# Altium PCB 4th_4G.PcbDoc
Units mm, origin at the board's own origin, x right, y up, seen from the top; angles counter-clockwise.
Board outline 35.75 x 48.25 mm, 2 copper layers (Top Layer, Bottom Layer); 40 components, 31 nets, 233 pads, 26 vias.
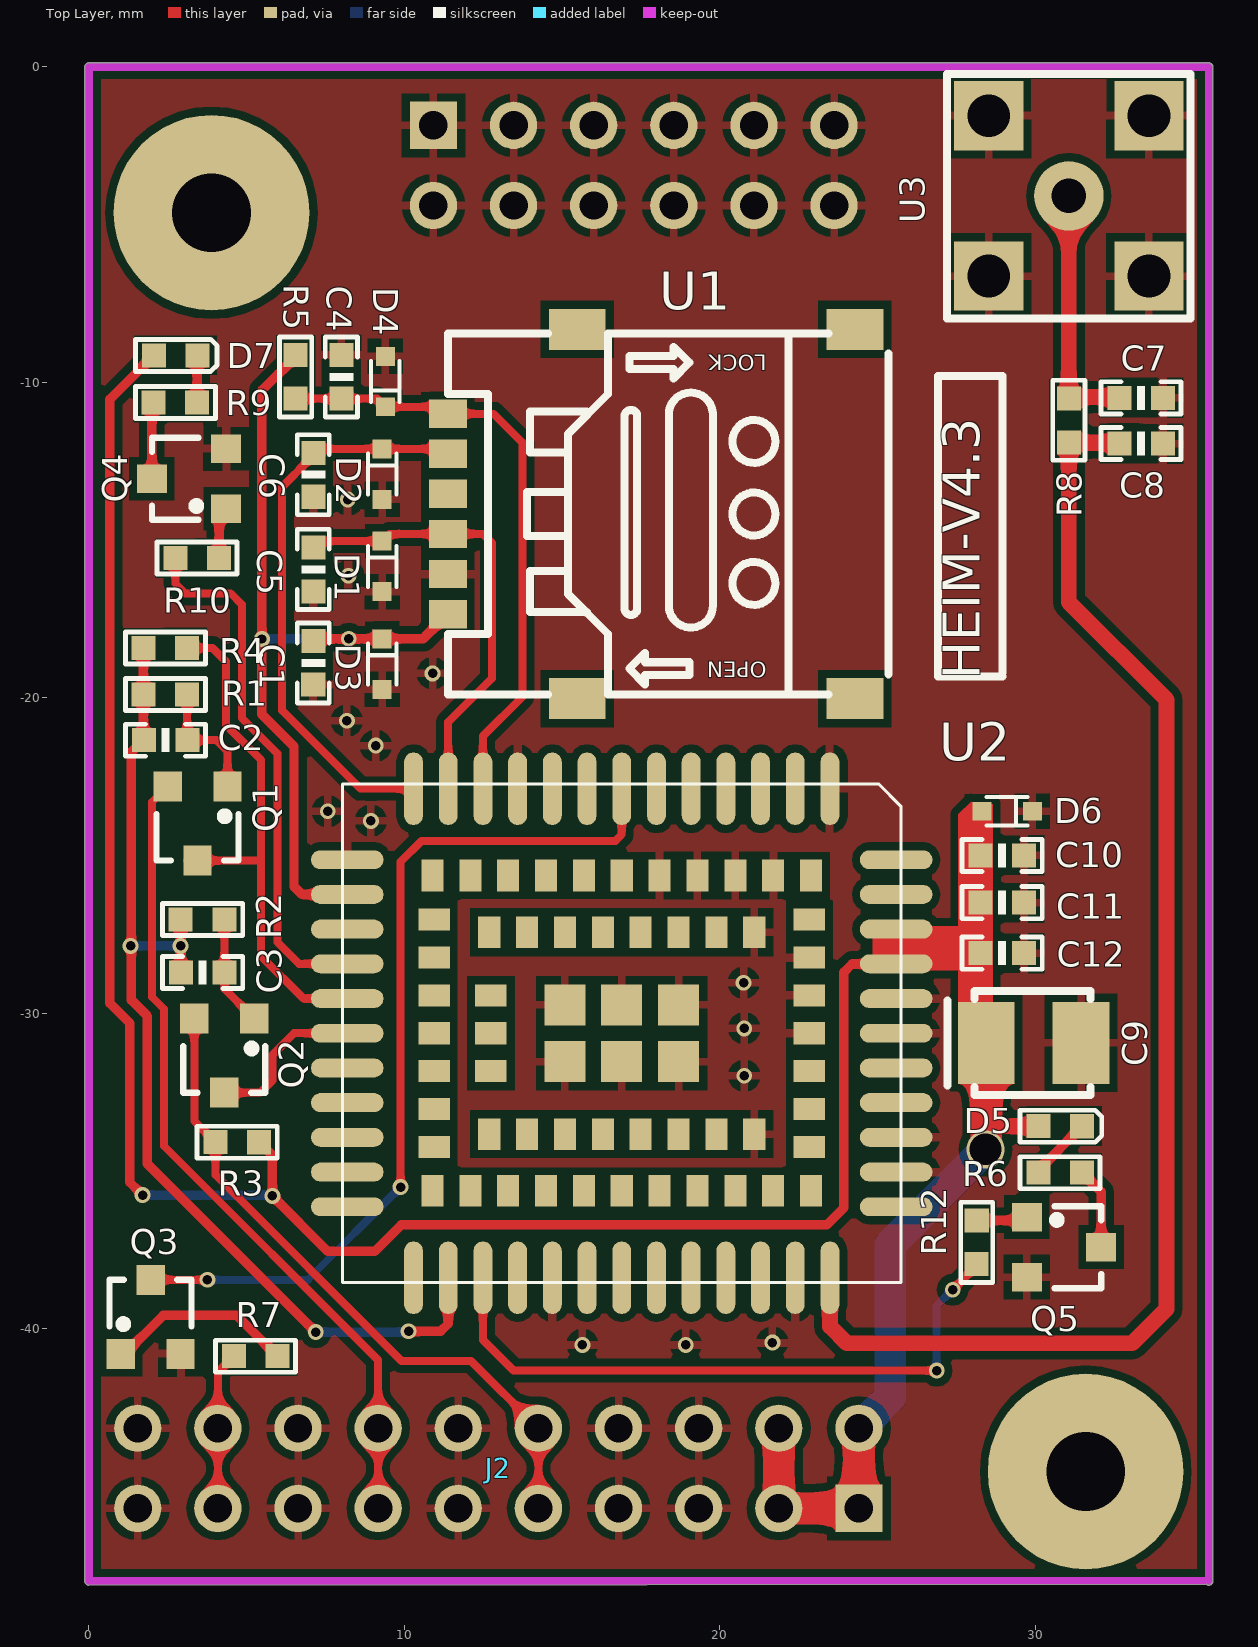
[diagram p0: Top Layer view]
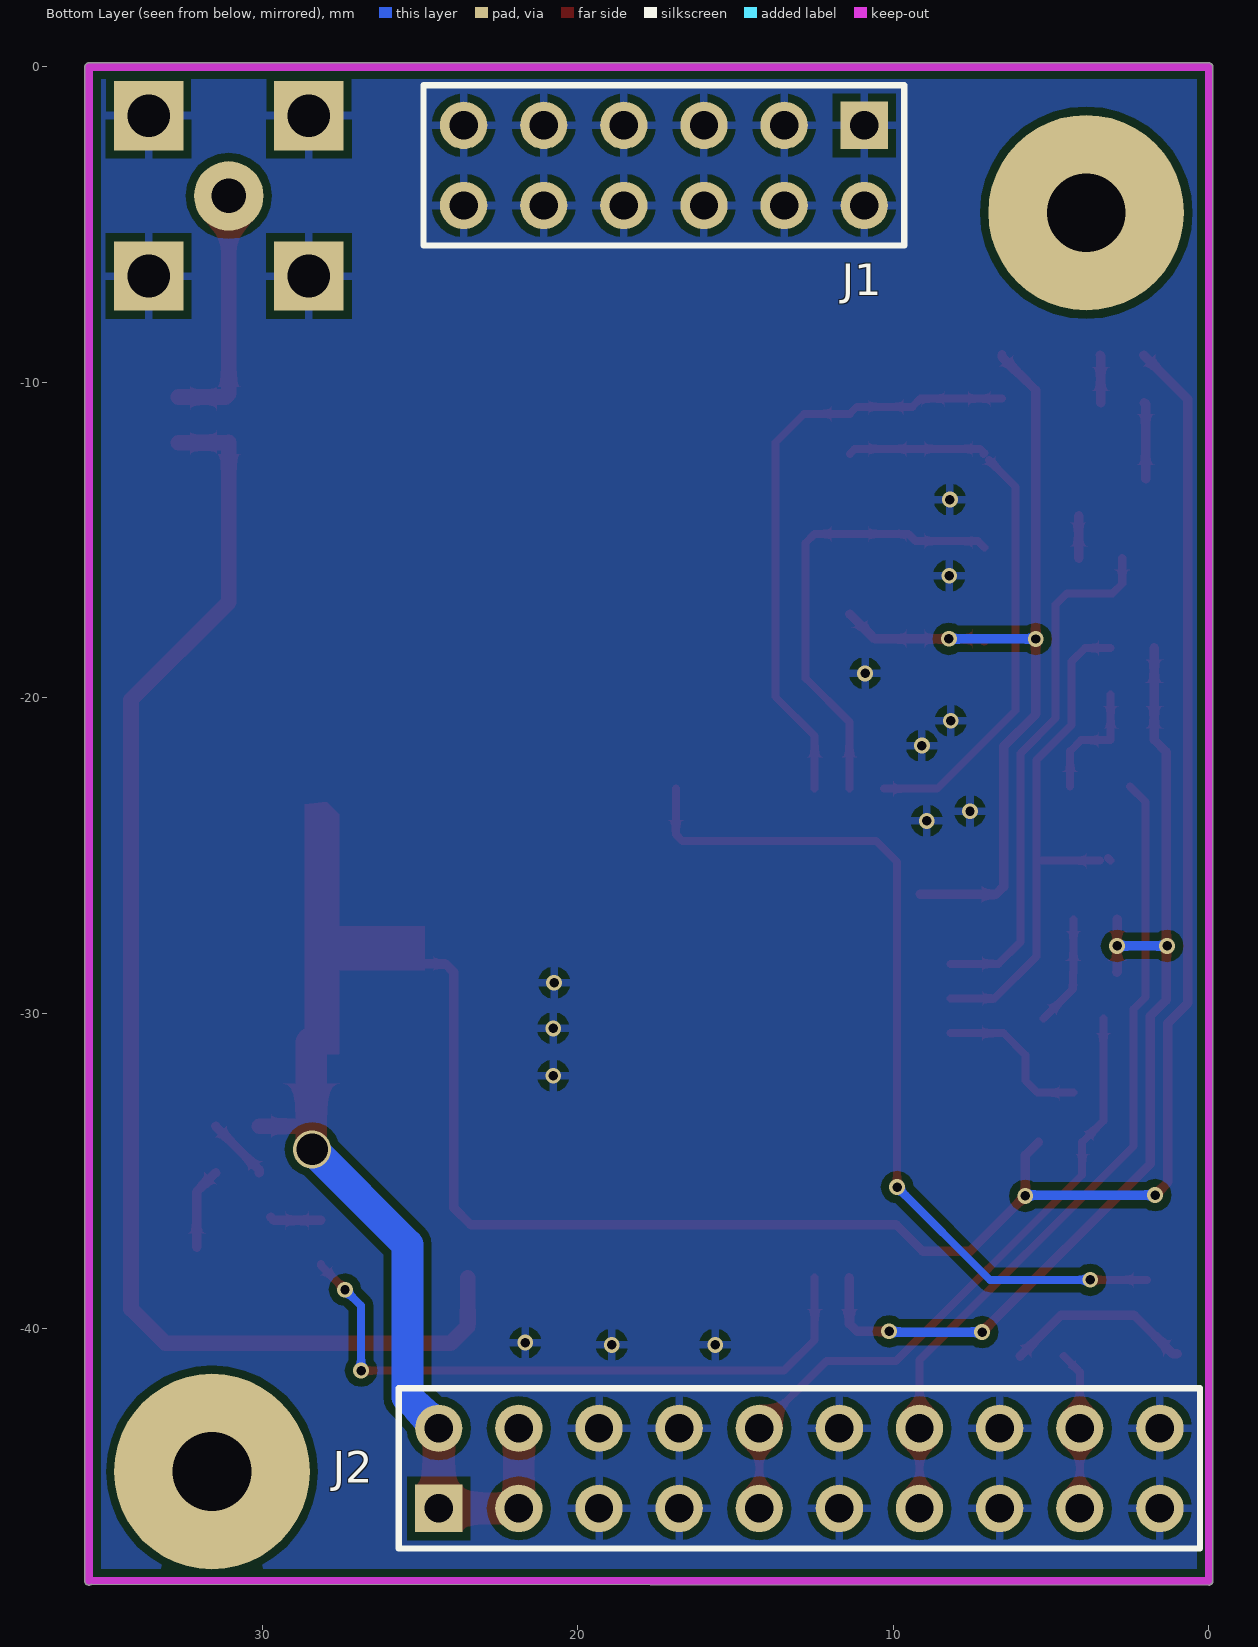
[diagram p1: Bottom Layer view, seen from below]

## Layer stack, top to bottom
Top Solder: solder mask 0.0102, Solder Resist, Dk 3.5
Top Layer: signal copper 0.0356
Dielectric 1: dielectric 0.32, FR-4, Dk 4.8
Bottom Layer: signal copper 0.0356
Bottom Solder: solder mask 0.0102, Solder Resist, Dk 3.5

## Board outline
-0.127,-48 -0.127,0 cw(c0,0) 0,0.127 35.5,0.127 cw(c35.5,0) 35.627,0 35.627,-48 cw(c35.5,-48) 35.419,-48.099 0,-48.127 cw(c0,-48)

## Design rules (kind name [scope] priority, off if disabled: settings)
Clearance [All] p1: gap=0.254
PolygonConnect [All] p1: connectstyle=Relief reliefconductorwidth=0.254 reliefentries=4 polygonreliefangle="90 Angle" airgapwidth=0.254
RoutingVias [All] p1: holewidth=0.3 width=0.5 viastyle="Through Hole" minholewidth=0.3 minwidth=0.5 maxholewidth=1 maxwidth=1.5
SolderMaskExpansion [All] p1: expansion=0.102
Width [All] p1: maxlimit=1 minlimit=0.254 preferedwidth=0.254
30 further rules are at their usual default settings.

## Components (designator, comment, footprint, x,y, rotation, side; value= is the part's Value field where it differs from the comment)
C1 "100NF/50V" 0603_C 7.112,-18.898 r90 top
C2 "1NF/50V" 0603_C 2.428,-21.343 r0 top
C3 "1NF/50V" 0603_C 3.607,-28.702 r0 top
C4 "33PF/50V" 0603_C 8.001,-9.83 r90 top
C5 "33PF/50V" 0603_C 7.115,-15.926 r270 top
C6 "33PF/50V" 0603_C 7.115,-12.929 r270 top
C7 "[NC]" 0603_C 33.35,-10.49 r0 top
C8 "[NC]" 0603_C 33.35,-11.938 r0 top
C9 "100UF/6.3V" CASE-B_3528 28.448,-30.937 r180 top
C10 "100NF/50V" 0603_C 28.948,-24.994 r0 top
C11 "33PF/50V" 0603_C 28.948,-26.492 r0 top
C12 "10PF/50V" 0603_C 28.948,-28.092 r0 top
D1 "PESDNC5D5VB" SOD-523 9.296,-15.832 r270 top
D2 "PESDNC5D5VB" SOD-523 9.296,-12.911 r270 top
D3 "PESDNC5D5VB" SOD-523 9.296,-18.931 r270 top
D4 "PESDNC5D5VB" SOD-523 9.398,-9.974 r90 top
D5 "绿色" 0603_D 30.785,-33.579 r0 top
D6 "PESDNC5D5VB" SOD-523 29.108,-23.597 r180 top
D7 "白色" 0603_D 2.743,-9.144 r0 top
J1 "Header 6X2A" HDR2X6_CEN 10.922,-1.854 r0 bottom locked
J2 "Header 10X2A" HDR2X10_CEN 24.409,-45.695 r180 top locked
Q1 "BC817-40" SOT-23-3 3.444,-23.984 r180 top
Q2 "BC817-40" SOT-23-3 4.293,-31.344 r180 top
Q3 "BC817-40" SOT-23-3 1.956,-39.624 r0 top
Q4 "BC817-40" SOT-23-3 3.175,-13.056 r90 top
Q5 "BC817-40" SOT-23-3 30.912,-37.414 r270 top
R1 "4.7KΩ/1%" 0603_R 2.428,-19.895 r180 top
R2 "4.7KΩ/1%" 0603_R 3.607,-27.026 r180 top
R3 "10KΩ/1%" 0603_R 4.699,-34.087 r0 top
R4 "10KΩ/1%" 0603_R 2.428,-18.422 r180 top
R5 "15K" 0603_R 6.553,-9.83 r90 top
R6 "2.2KΩ/1%" 0603_R 30.785,-35.052 r0 top
R7 "4.7KΩ/1%" 0603_R 5.283,-40.869 r0 top
R8 "0Ω" 0603_R 31.066,-11.201 r270 top
R9 "2.2KΩ/1%" 0603_R 2.743,-10.643 r180 top
R10 "4.7KΩ/1%" 0603_R 3.429,-15.57 r0 top
R12 "4.7KΩ/1%" 0603_R 28.143,-37.262 r90 top
U1 "SIM卡座" SIM卡座-NANO掀盖式 17.831,-14.173 r180 top
U2 "EC800E-CN" EC800E-CN 16.891,-30.632 r270 top
U3 "ANT" SMA-KWE/弯头 28.524,-6.629 r0 top

## Footprints (in the part's own frame and the unit in brackets; to place one, negate y for a bottom-side part, rotate by r counter-clockwise, add the part's x,y. Pads: shape width x height; smd on the part's side, far side on the other; paste and mask are expansions set on the pad)
0603_C [mil] "电容"
  rect 30x30 smd: 1(-27,0) 2(27.5,-0.06)
  silkscreen extent -50,-20 50,20
0603_D [mil] "贴片发光二极管"
  rect 30x30 smd: 1(-27,0) 2(27.5,-0.06)
  silkscreen extent -50,-20 52,20
0603_R [mil] "电阻"
  rect 30x30 smd: 1(-27,0) 2(27.5,-0.06)
  silkscreen extent -50,-20 50,20
CASE-B_3528 [mm]
  rect 1.8x2.6 smd: 1(0,0) 2(-3.002,0)
  silkscreen extent -3.3,-1.65 1.23,1.65
EC800E-CN [mm] "EC800E-CN Moudle 109PIN 15.8X17.7mm H2.4mm RO"
  oval 2.3x0.6 smd mask+0.05: 1(-7.75,6.6) 2(-7.75,5.5) 3(-7.75,4.4) 4(-7.75,3.3) 5(-7.75,2.2) 6(-7.75,1.1) 7(-7.75,0) 8(-7.75,-1.1) 9(-7.75,-2.2) 10(-7.75,-3.3) 11(-7.75,-4.4) 12(-7.75,-5.5) 13(-7.75,-6.6) 23(7.75,-6.6) 24(7.75,-5.5) 25(7.75,-4.4) 26(7.75,-3.3) 27(7.75,-2.2) 28(7.75,-1.1) 29(7.75,0) 30(7.75,1.1) 31(7.75,2.2) 32(7.75,3.3) 33(7.75,4.4) 34(7.75,5.5) 35(7.75,6.6)
  oval 0.6x2.3 smd mask+0.05: 14(-4.4,-8.7) 15(-3.3,-8.7) 16(-2.2,-8.7) 17(-1.1,-8.7) 18(0,-8.7) 19(1.1,-8.7) 20(2.2,-8.7) 21(3.3,-8.7) 22(4.4,-8.7) 36(4.4,8.7) 37(3.3,8.7) 38(2.2,8.7) 39(1.1,8.7) 40(0,8.7) 41(-1.1,8.7) 42(-2.2,8.7) 43(-3.3,8.7) 44(-4.4,8.7) 95(-5.5,-8.7) 96(5.5,-8.7) 97(5.5,8.7) 98(-5.5,8.7)
  rect 1x0.7 smd mask+0.05: 45(-5,4.8) 46(-5,3.6) 47(-5,2.4) 48(-5,1.2) 49(-5,0) 50(-5,-1.2) 51(-5,-2.4) 52(-5,-3.6) 53(-5,-4.8) 59(5,-4.8) 60(5,-3.6) 61(5,-2.4) 62(5,-1.2) 63(5,0) 64(5,1.2) 65(5,2.4) 66(5,3.6) 67(5,4.8) 73(-3.2,4.2) 74(-3.2,3) 75(-3.2,1.8) 76(-3.2,0.6) 77(-3.2,-0.6) 78(-3.2,-1.8) 79(-3.2,-3) 80(-3.2,-4.2) 81(3.2,-4.2) 82(3.2,-3) 83(3.2,-1.8) 84(3.2,-0.6) 85(3.2,0.6) 86(3.2,1.8) 87(3.2,3) 88(3.2,4.2) 99(-5,6) 100(-5,-6) 103(5,-6) 104(5,6)
  rect 0.7x1 smd mask+0.05: 54(-2.4,-5.95) 55(-1.2,-5.95) 56(0,-5.95) 57(1.2,-5.95) 58(2.4,-5.95) 68(2.4,5.95) 69(1.2,5.95) 70(0,5.95) 71(-1.2,5.95) 72(-2.4,5.95) 101(-3.6,-5.95) 102(3.6,-5.95) 105(3.6,5.95) 106(-3.6,5.95) 107(-1.2,-4.15) 108(0,-4.15) 109(1.2,-4.15)
  rect 1.3x1.3 smd mask+0.05: 89(-0.9,1.8) 90(0.9,1.8) 91(-0.9,0) 92(0.9,0) 93(-0.9,-1.8) 94(0.9,-1.8)
  silkscreen extent -7.9,-8.85 7.9,8.85, body extent -7.9,-8.85 7.9,8.85, height 3.81
HDR2X6_CEN [mm] "Connector; Header; 6x2 Position"
  rect 1.5x1.5 hole 0.9: 1(0,0)
  round 1.5 hole 0.9: 2(2.54,0) 3(5.08,0) 4(7.62,0) 5(10.16,0) 6(12.7,0) 7(0,2.54) 8(2.54,2.54) 9(5.08,2.54) 10(7.62,2.54) 11(10.16,2.54) 12(12.7,2.54)
  silkscreen extent -1.27,-1.27 13.97,3.81
HDR2X10_CEN [mm] "Connector; Header; 10x2 Position"
  rect 1.5x1.5 hole 0.9: 1(0,0)
  round 1.5 hole 0.9: 2(2.54,0) 3(5.08,0) 4(7.62,0) 5(10.16,0) 6(12.7,0) 7(15.24,0) 8(17.78,0) 9(20.32,0) 10(22.86,0) 11(0,-2.54) 12(2.54,-2.54) 13(5.08,-2.54) 14(7.62,-2.54) 15(10.16,-2.54) 16(12.7,-2.54) 17(15.24,-2.54) 18(17.78,-2.54) 19(20.32,-2.54) 20(22.86,-2.54)
SIM卡座-NANO掀盖式 [mm]
  rect 1.8x1.3 smd: 0(-6.451,5.853) 0(-6.451,-5.853) 0(2.349,5.853) 0(2.349,-5.853)
  rect 1.2x0.9 smd: 1(6.451,3.173) 2(6.451,0.633) 3(6.451,-1.907) 4(6.451,1.903) 5(6.451,-0.637) 6(6.451,-3.177)
  silkscreen extent -7.52,-5.72 6.45,5.72
SMA-KWE/弯头 [mm] "总长14.5mm/牙长8.5mm"
  rect 2.2x2.2 hole 1.35: 0(0,0) 0(0,5.08) 0(5.08,0) 0(5.08,5.08)
  round 2.2 hole 1.1: 1(2.54,2.54)
  silkscreen extent -1.32,-1.35 6.4,6.4
SOD-523 [mm]
  rect 0.6x0.6 smd: 1(-0.8,0) 2(0.8,0)
  silkscreen extent -0.65,-0.45 0.65,0.45
SOT-23-3 [mm]
  rect 0.9x0.95 smd: 1(-0.95,-1.175) 2(0.95,-1.175) 3(0,1.175)
  silkscreen extent -1.3,-0.35 1.3,1.18

## Part data
C1 C2 C3 C4 C5 C6 C7 C8 C10 C11 C12: library part CAP, "无极性电容"
C9: library part "CAP POLAR", "钽电容"
D1 D2 D3 D4 D6: library part TVS, "TVS 瞬态抑制二极管"
D5 D7: library part LED, "发光二极管"
J1: "Header, 6-Pin, Dual row"
J2: "Header, 10-Pin, Dual row"
Q1 Q2 Q4 Q5: library part S8050, "NPN"
Q3: "NPN三极管"
R1 R2 R3 R4 R5 R6 R7 R8 R9 R10 R12: library part RES2, "电阻"
U1: "无保护引脚SIM卡座"
U2: "EC800E-CN Module 109PIN 15.8x17.7mm H2.4mm RO"
U3: "天线座"

## Free pads (board coordinates)
  round 6.2 hole 2.5: 1(3.886,-4.623) 2(31.598,-44.526)

## Via types
v1: diameter 0.5, hole 0.3, Top Layer to Bottom Layer, tented both sides, 25 vias
v2: diameter 1.2, hole 1, Top Layer to Bottom Layer, tented both sides, 1 vias

## Nets (pads, with @x,y where several pads share a name; then routed paths per layer and width w, separated by ;. In a path a pad name is that pad's centre, name@x,y a point inside that pad or via, vN(x,y) a via of type N, cw(c..) or ccw(c..) an arc to the next point about the centre after c; other vN are vias at no path point)
4G_POWER: J2.9 J2.19 R7.1 | length 5
  Top Layer w0.254: J2.9 J2.19 4.089,-41.377 R7.1
4G_RX: J2.5 J2.15 Q2.2 R3.1 | length 21.3
  Top Layer w0.254: Q2.2 3.343,-33.416 R3.1 4.013,-35.121 9.913,-41.021 12.116,-41.021 J2.15 J2.5
4G_TX: J2.7 J2.17 Q1.2 | length 26.1
  Top Layer w0.254: Q1.2 2.007,-23.297 2.007,-29.489 2.388,-29.87 2.388,-34.214 9.169,-40.996 J2.17 J2.7
ANT_MAIN: C8.1 R8.2 U2.35 | length 43.2
  Top Layer w0.5: U2.35 23.491,-39.925 24.028,-40.462 33.071,-40.462 34.163,-39.37 34.163,-20.066 31.064,-16.967 R8.2 31.077,-11.913 C8.1@32.664,-11.913
GND: C1.1 C4.2 C5.2 C6.2 C7.2 C8.2 C9.2 C10.2 C11.2 C12.2 D1.2 D2.2 D3.2 D4.2 D6.1 J1.1 J1.2 J1.3 J1.4 J1.5 J1.6 J1.7 J1.8 J1.9 J1.10 J1.11 J1.12 J2.3 J2.4 J2.6 J2.8 J2.10 J2.13 J2.14 J2.16 J2.18 J2.20 Q3.2 Q4.2 Q5.2 U1.4 U2.1 U2.10 U2.27 U2.34 U2.36 U2.37 U2.40 U2.41 U2.45 U2.46 U2.47 U2.48 U2.70 U2.71 U2.72 U2.73 U2.88 U2.89 U2.90 U2.91 U2.92 U2.93 U2.94 U2.95 U3.0
  other v1: 15.646,-40.513 18.923,-40.513 21.666,-40.437 20.777,-31.979 20.777,-30.48 20.752,-29.032 8.941,-23.901 7.569,-23.597 9.093,-21.514 8.179,-20.726 10.897,-19.228 8.23,-16.129 8.204,-13.716
NET_STATUS: R10.1 U2.16 | length 16.9
  Top Layer w0.254: R10.1 2.743,-16.383 3.048,-16.688 4.496,-16.688 4.855,-17.047 4.855,-20.647 5.971,-21.763 5.971,-27.739 6.665,-28.432 U2.16
NetC2_2: C2.2 Q1.1 R1.1 | length 4
  Top Layer w0.254: R1.1 3.114,-21.332 C2.2 4.047,-21.344 4.394,-21.692 Q1.1
NetC3_2: C3.2 Q2.1 R2.1 | length 3.5
  Top Layer w0.254: C3.2@4.293,-28.704 R2.1 ; C3.2 4.305,-29.231 Q2.1
NetC7_1: C7.1 R8.1 U3.1 | length 7.9
  Top Layer w0.5: U3.1 31.064,-10.363 31.166,-10.465 C7.1@32.664,-10.465
NetD5_2: D5.2 R6.1 | length 2
  Top Layer w0.3: R6.1 30.099,-34.965 D5.2
NetD7_2: D7.2 R9.1 | length 1.5
  Top Layer w0.3: R9.1 3.429,-9.158 D7.2
NetQ3_1: Q3.1 R7.2 | length 6
  Top Layer w0.3: Q3.1 1.136,-40.799 2.362,-39.573 4.685,-39.573 R7.2
NetQ4_1: Q4.1 R10.2 | length 1.3
  Top Layer w0.3: R10.2 Q4.1@4.127,-14.228
NetQ4_3: Q4.3 R9.2 | length 2.4
  Top Layer w0.3: Q4.3 2,-10.686 R9.2
NetQ5_1: Q5.1 R12.2 | length 1.6
  Top Layer w0.3: R12.2 29.638,-36.563 Q5.1
NetQ5_3: Q5.3 R6.2 | length 2.6
  Top Layer w0.3: R6.2 32.087,-35.657 Q5.3
PWRKEY: Q3.3 U2.7 | length 28.3
  Top Layer w0.254: Q3.3 v1(3.759,-38.449) ; v1(9.881,-35.509) 9.881,-25.197 10.541,-24.536 16.688,-24.536 16.891,-24.333 U2.7
  Bottom Layer w0.254: v1(3.759,-38.449) 6.941,-38.449 v1(9.881,-35.509)
RESET_EN: U2.15
RXD: Q1.3 R4.1 U2.17 | length 16.6
  Top Layer w0.254: Q1.3@3.114,-25.159 Q1.3@3.195,-25.078 ; R4.1 3.918,-18.422 4.347,-18.851 4.347,-20.857 5.463,-21.973 5.463,-28.196 6.799,-29.532 U2.17 ; Q1.3 5.45,-25.159
STATUS: R12.1 U2.25 | length 20.7
  Top Layer w0.254: U2.25 12.491,-40.355 13.462,-41.326 v1(26.873,-41.326) ; v1(27.381,-38.76) 28.143,-37.998 R12.1
  Bottom Layer w0.254: v1(26.873,-41.326) 26.873,-39.268 v1(27.381,-38.76)
TXD: Q2.3 U2.18 | length 5.2
  Top Layer w0.254: Q2.3 5.429,-32.519 5.817,-32.131 5.817,-31.318 6.502,-30.632 U2.18
USB_BOOT: U2.82
USB_DM: U2.60
USB_DP: U2.59
USIM_CLK: C6.1 D2.1 U1.3 U2.13 | length 17.9
  Top Layer w0.254: C6.1@6.972,-12.468 6.121,-13.319 6.121,-20.396 8.608,-22.882 U2.13 ; C6.1@7.141,-12.268 C6.1 7.247,-12.111 D2.1 11.224,-12.111 U1.3
USIM_DATA: C4.1 D4.1 R5.1 U1.6 U2.11 | length 19.3
  Top Layer w0.254: R5.1 C4.1 9.139,-10.516 D4.1 11.158,-10.774 U1.6 12.825,-10.997 13.741,-11.913 13.741,-19.964 12.491,-21.215 U2.11
USIM_DET: U2.79
USIM_RST: C5.1 D1.1 U1.2 U2.12 | length 14.3
  Top Layer w0.254: C5.1 7.323,-15.032 D1.1 9.522,-14.807 U1.2 12.495,-14.807 12.776,-15.088 12.776,-19.38 11.391,-20.765 U2.12
USIM_VDD: C1.2 D3.1 R5.2 U1.1 U2.14 | length 27.8
  Top Layer w0.3: R5.2 6.555,-9.193 6.017,-9.731 6.005,-9.731 5.486,-10.249 v1(5.486,-18.136) 5.486,-20.527 6.502,-21.543 6.502,-25.984 6.751,-26.232 U2.14 U2.14@9.15,-26.232 ; C1.2 7.182,-18.131 v1(8.239,-18.131) D3.1 10.596,-18.131 U1.1
  Bottom Layer w0.3: v1(5.486,-18.136) 5.491,-18.131 v1(8.239,-18.131)
VBAT_BB: C9.1 C10.1 C11.1 C12.1 D5.1 D6.2 D7.1 J2.1 J2.2 J2.11 J2.12 R3.2 U2.42 U2.43 | length 85.4
  Top Layer w0.3: v1(1.702,-35.763) 1.295,-35.357 1.295,-30.313 0.66,-29.678 0.66,-10.541 D7.1 ; R3.2 5.817,-34.508 v1(5.817,-35.789) 7.569,-37.541 9.068,-37.541 9.906,-36.703 23.393,-36.703 23.927,-36.17 23.927,-28.702 24.196,-28.432 U2.42
  Top Layer w0.5: 28.524,-33.579 D5.1
  Top Layer w1: J2.12 J2.2 J2.1 J2.11 ; v2(28.423,-34.315) 28.448,-34.29 C9.1
  Bottom Layer w0.3: v1(1.702,-35.763) 5.791,-35.763 v1(5.817,-35.789)
  Bottom Layer w1: J2.11 25.4,-42.164 25.4,-37.338 v2(28.423,-34.315)
VDD_EXT: C2.1 C3.1 R1.2 R2.2 R4.2 U2.24 | length 33.3
  Top Layer w0.3: R4.2 R1.2 1.73,-21.33 1.346,-21.713 1.346,-29.58 1.857,-30.09 1.857,-34.775 v1(7.188,-40.107) ; R2.2 v1(2.908,-27.864) 2.908,-28.689 C3.1 ; v1(10.135,-40.081) 11.151,-40.081 11.391,-39.841 U2.24
  Bottom Layer w0.3: v1(1.321,-27.864) v1(2.908,-27.864) ; v1(7.188,-40.107) 10.109,-40.107 v1(10.135,-40.081)
pads on no net: U1.0 U1.5 U2.2 U2.3 U2.4 U2.5 U2.6 U2.8 U2.9 U2.19 U2.20 U2.21 U2.22 U2.23 U2.26 U2.28 U2.29 U2.30 U2.31 U2.32 U2.33 U2.38 U2.39 U2.44 U2.49 U2.50 U2.51 U2.52 U2.53 U2.54 U2.55 U2.56 U2.57 U2.58 U2.61 U2.62 U2.63 U2.64 U2.65 U2.66 U2.67 U2.68 U2.69 U2.74 U2.75 U2.76 U2.77 U2.78 U2.80 U2.81 U2.83 U2.84 U2.85 U2.86 U2.87 U2.96 U2.97 U2.98 U2.99 U2.100 U2.101 U2.102 U2.103 U2.104 U2.105 U2.106 U2.107 U2.108 U2.109

## Polygon pours and split planes (outlines as drawn)
GND on Bottom Layer "GND" (solid, remove dead copper, pour order 4): 0,0 35.5,0 35.5,-48 0,-48
GND on Top Layer "GND" (solid, remove dead copper, pour order 3): 0,0 35.5,0 35.5,-48 0,-48

## Keep-outs
Keep-Out Layer:
  lines w0.254: 0,-48 0,0 35.5,0 35.5,-48 0,-48

## Other copper
Top Layer:
  rectangle net VBAT_BB: 24.841,-28.651 28.143,-27.229
  region net VBAT_BB: 28.651,-23.368 28.651,-31.344 28.6,-31.293 27.559,-31.293 27.559,-23.698 27.965,-23.292

## Silkscreen, mask and mechanical layers (free items; w line width, h text height)
Top Overlay:
  lines w0.254: 28.956,-19.329 26.924,-19.329 26.924,-9.804 28.956,-9.804 28.956,-19.202
  text "HEIM-V4.3" at 28.626,-19.406 h2 r90

## Dimensions
0,0 to 0,-48 on Keep-Out Layer
0,0 to 35.5,0 on Keep-Out Layer

## Text inside footprints (layer, text, board x,y; h text height)
U1: Top Overlay "OPEN" at 21.482,-18.851 h0.5 r180; Top Overlay "LOCK" at 21.482,-9.123 h0.5 r180
U2: Mechanical 5 "2" at 22.391,-22.842 h0.1 r270; Mechanical 5 "35" at 23.491,-38.302 h0.1 r270; Mechanical 5 "98" at 25.591,-25.052 h0.1 r270; Mechanical 5 "28" at 15.791,-38.302 h0.1 r270; Mechanical 5 "29" at 16.891,-38.302 h0.1 r270; Mechanical 5 "38" at 25.591,-32.752 h0.1 r270; Mechanical 5 "39" at 25.591,-31.652 h0.1 r270; Mechanical 5 "1" at 23.491,-22.842 h0.1 r270; Mechanical 5 "10" at 13.591,-22.802 h0.1 r270; Mechanical 5 "34" at 22.391,-38.302 h0.1 r270; Mechanical 5 "27" at 14.691,-38.302 h0.1 r270; Mechanical 5 "41" at 25.591,-29.452 h0.1 r270; Mechanical 5 "40" at 25.591,-30.552 h0.1 r270; Mechanical 5 "37" at 25.591,-33.852 h0.1 r270; Mechanical 5 "36" at 25.591,-34.952 h0.1 r270; Mechanical 5 "22" at 8.191,-34.952 h0.1 r270; Mechanical 5 "21" at 8.191,-33.852 h0.1 r270; Mechanical 5 "19" at 8.191,-31.652 h0.1 r270; Mechanical 5 "20" at 8.191,-32.752 h0.1 r270; Mechanical 5 "23" at 10.291,-38.302 h0.1 r270; Mechanical 5 "17" at 8.191,-29.452 h0.1 r270; Mechanical 5 "18" at 8.191,-30.552 h0.1 r270; Mechanical 5 "16" at 8.191,-28.352 h0.1 r270; Mechanical 5 "30" at 17.991,-38.302 h0.1 r270; Mechanical 5 "32" at 20.191,-38.302 h0.1 r270; Mechanical 5 "33" at 21.291,-38.302 h0.1 r270; Mechanical 5 "31" at 19.091,-38.302 h0.1 r270; Mechanical 5 "7" at 16.891,-22.842 h0.1 r270; Mechanical 5 "3" at 21.291,-22.842 h0.1 r270; Mechanical 5 "95" at 8.191,-25.052 h0.1 r270; Mechanical 5 "96" at 8.191,-36.052 h0.1 r270; Mechanical 5 "4" at 20.191,-22.842 h0.1 r270; Mechanical 5 "5" at 19.091,-22.842 h0.1 r270; Mechanical 5 "6" at 17.991,-22.842 h0.1 r270; Mechanical 5 "8" at 15.791,-22.842 h0.1 r270; Mechanical 5 "9" at 14.691,-22.842 h0.1 r270; Mechanical 5 "26" at 13.591,-38.302 h0.1 r270; Mechanical 5 "44" at 25.591,-26.152 h0.1 r270; Mechanical 5 "97" at 25.591,-36.052 h0.1 r270; Mechanical 5 "15" at 8.191,-27.252 h0.1 r270; Mechanical 5 "25" at 12.491,-38.302 h0.1 r270; Mechanical 5 "13" at 10.291,-22.802 h0.1 r270; Mechanical 5 "11" at 12.491,-22.802 h0.1 r270; Mechanical 5 "12" at 11.391,-22.802 h0.1 r270; Mechanical 5 "14" at 8.191,-26.152 h0.1 r270; Mechanical 5 "43" at 25.591,-27.252 h0.1 r270; Mechanical 5 "42" at 25.591,-28.352 h0.1 r270; Mechanical 5 "24" at 11.391,-38.302 h0.1 r270; Mechanical 5 "46" at 20.491,-25.552 h0.1 r270; Mechanical 5 "47" at 19.291,-25.552 h0.1 r270; Mechanical 5 "48" at 18.091,-25.552 h0.1 r270; Mechanical 5 "72" at 22.841,-28.152 h0.1 r270; Mechanical 5 "71" at 22.841,-29.352 h0.1 r270; Mechanical 5 "70" at 22.841,-30.552 h0.1 r270; Mechanical 5 "45" at 21.691,-25.552 h0.1 r270; Mechanical 5 "67" at 21.691,-35.552 h0.1 r270; Mechanical 5 "66" at 20.491,-35.552 h0.1 r270; Mechanical 5 "99" at 22.891,-25.552 h0.1 r270; Mechanical 5 "49" at 16.891,-25.552 h0.1 r270; Mechanical 5 "50" at 15.691,-25.552 h0.1 r270; Mechanical 5 "51" at 14.491,-25.552 h0.1 r270; Mechanical 5 "52" at 13.291,-25.552 h0.1 r270; Mechanical 5 "53" at 12.091,-25.552 h0.1 r270; Mechanical 5 "100" at 10.891,-25.512 h0.1 r270; Mechanical 5 "104" at 22.891,-35.512 h0.1 r270; Mechanical 5 "65" at 19.291,-35.552 h0.1 r270; Mechanical 5 "64" at 18.091,-35.552 h0.1 r270; Mechanical 5 "63" at 16.891,-35.552 h0.1 r270; Mechanical 5 "62" at 15.691,-35.552 h0.1 r270; Mechanical 5 "103" at 10.891,-35.512 h0.1 r270; Mechanical 5 "106" at 22.841,-26.912 h0.1 r270; Mechanical 5 "69" at 22.841,-31.752 h0.1 r270; Mechanical 5 "68" at 22.841,-32.952 h0.1 r270; Mechanical 5 "105" at 22.841,-34.112 h0.1 r270; Mechanical 5 "101" at 10.941,-26.912 h0.1 r270; Mechanical 5 "54" at 10.941,-28.152 h0.1 r270; Mechanical 5 "55" at 10.941,-29.352 h0.1 r270; Mechanical 5 "56" at 10.941,-30.552 h0.1 r270; Mechanical 5 "57" at 10.941,-31.752 h0.1 r270; Mechanical 5 "58" at 10.941,-32.952 h0.1 r270; Mechanical 5 "102" at 10.941,-34.112 h0.1 r270; Mechanical 5 "60" at 13.291,-35.552 h0.1 r270; Mechanical 5 "59" at 12.091,-35.552 h0.1 r270; Mechanical 5 "61" at 14.491,-35.552 h0.1 r270; Mechanical 5 "73" at 21.091,-27.352 h0.1 r270; Mechanical 5 "88" at 21.091,-33.752 h0.1 r270; Mechanical 5 "74" at 19.891,-27.352 h0.1 r270; Mechanical 5 "75" at 18.691,-27.352 h0.1 r270; Mechanical 5 "76" at 17.491,-27.352 h0.1 r270; Mechanical 5 "77" at 16.291,-27.352 h0.1 r270; Mechanical 5 "78" at 15.091,-27.352 h0.1 r270; Mechanical 5 "80" at 12.691,-27.352 h0.1 r270; Mechanical 5 "107" at 12.741,-29.312 h0.1 r270; Mechanical 5 "108" at 12.741,-30.512 h0.1 r270; Mechanical 5 "87" at 19.891,-33.752 h0.1 r270; Mechanical 5 "86" at 18.691,-33.752 h0.1 r270; Mechanical 5 "85" at 17.491,-33.752 h0.1 r270; Mechanical 5 "84" at 16.291,-33.752 h0.1 r270; Mechanical 5 "83" at 15.091,-33.752 h0.1 r270; Mechanical 5 "81" at 12.691,-33.752 h0.1 r270; Mechanical 5 "109" at 12.741,-31.712 h0.1 r270; Mechanical 5 "82" at 13.891,-33.752 h0.1 r270; Mechanical 5 "79" at 13.891,-27.352 h0.1 r270; Mechanical 5 "89" at 18.691,-29.652 h0.1 r270; Mechanical 5 "91" at 16.891,-29.652 h0.1 r270; Mechanical 5 "93" at 15.091,-29.652 h0.1 r270; Mechanical 5 "90" at 18.691,-31.452 h0.1 r270; Mechanical 5 "92" at 16.891,-31.452 h0.1 r270; Mechanical 5 "94" at 15.091,-31.452 h0.1 r270